# EAGLE board Apo Board 2017  (EAGLE 7.3.0)
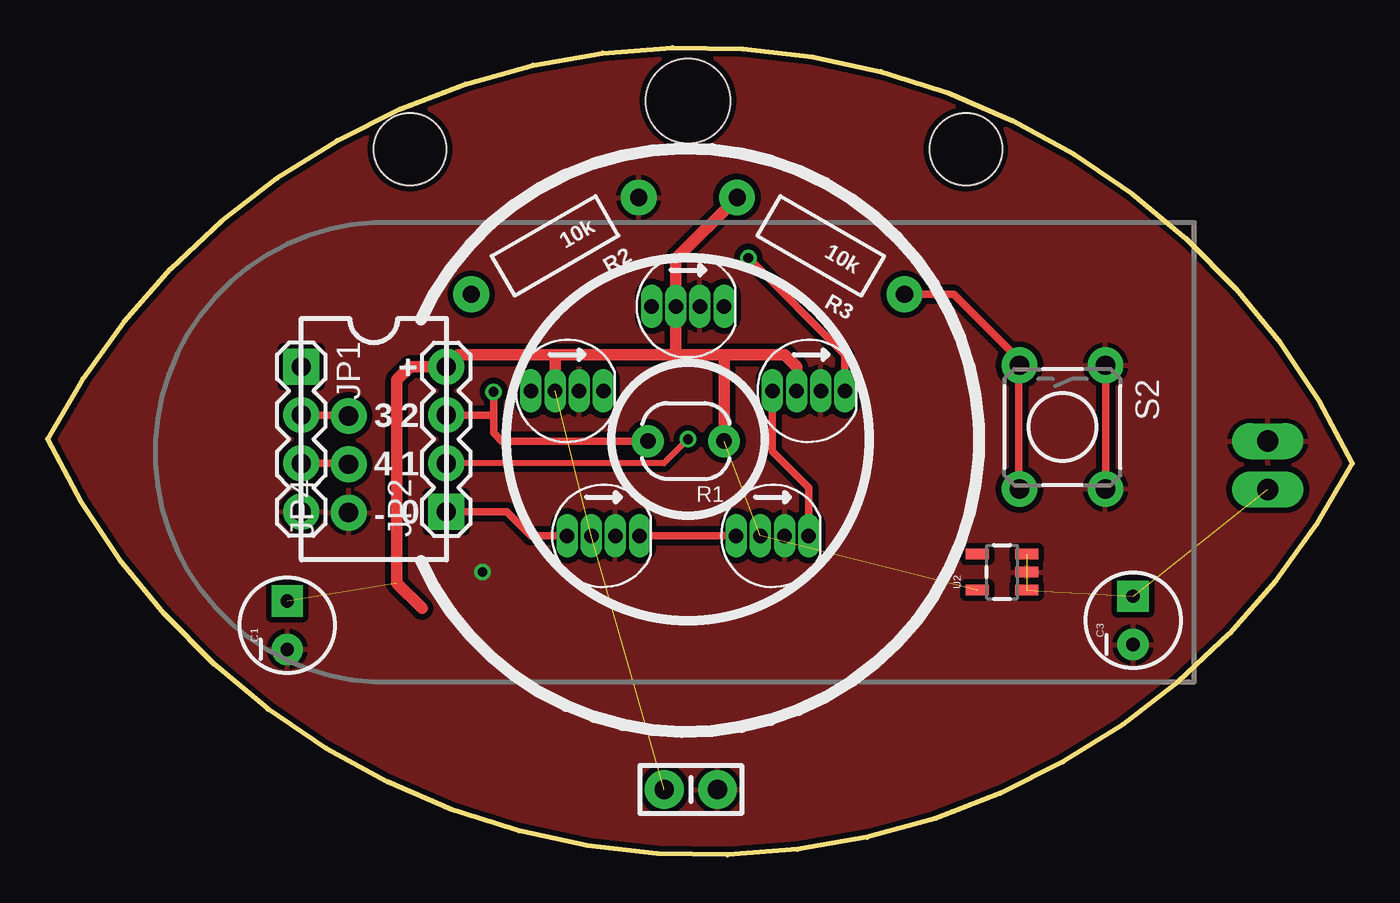
[diagram p0: board, top side]
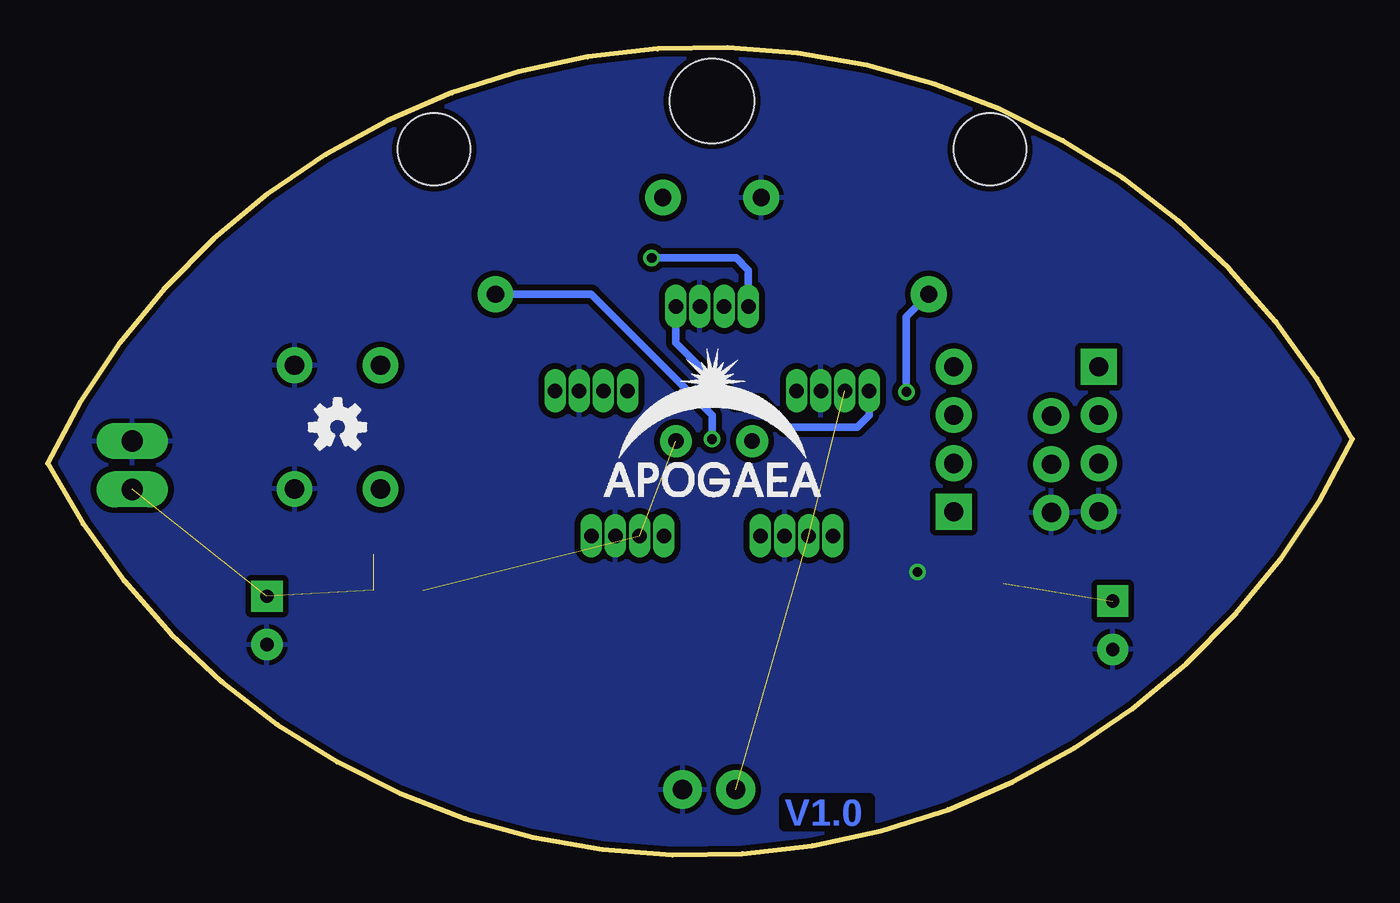
[diagram p1: board, bottom side, seen from below]

Size 68.58 x 42.43 mm. Coordinates in mm from the lower left corner, seen from the top.
Outline: 0,21.85 arc-127 68.58,20.58 arc-127 0,21.85
Copper layers (1*16): Top 0.035mm / dielectric 1.5mm / Bottom 0.035mm
Design rules "SparkFun-2-layer-TIGHT": minimum track width 7mil, minimum drill 15mil, track to track 7mil, track to pad 7mil, pad to pad 7mil, via to via 7mil, smd to smd 7mil, copper to edge 7mil, drill to drill 7mil, minimum pad ring 7mil, minimum via ring 7mil, stop-mask expansion 4mil, vias tented up to drill 25mil, thermal gap 10mil
Net classes: 0 Default: width 0.203 mm
Holes 4.45 mm at 33.66,39.63
Holes 3.81 mm at 19.05,37.09 48.26,37.09

## Footprints (pad centres in the part's own frame; a part is rotated, then mirrored left to right if it is on the bottom)
CAP-PTH-SMALL-KIT = drill 1.016 pad 2.032: 1 -1.397,0; 2 1.397,0
CPOL-RADIAL-10UF-25V = drill 0.7 pad 1.651 square: 1 1.27,0 | drill 0.7 pad 1.651: 2 -1.27,0
1X04 = drill 1.016 pad 1.88 square: 1 0,0 | drill 1.016 pad 1.88: 2 2.54,0; 3 5.08,0; 4 7.62,0
1X02_LONGPADS = drill 1.118 pad 1.88 long: 1 0,0; 2 2.54,0
1X03_NO_SILK = drill 1.016 pad 1.88: 1 0,0; 2 2.54,0; 3 5.08,0
PHOTOCELL = drill 0.8 pad 1.676: 1 -2,0; 2 2,0
AXIAL-0.4 = drill 0.9 pad 1.88: P$1 -5.08,0; P$2 5.08,0
TACTILE-PTH = drill 1.016 pad 1.88: 1 -3.251,2.261; 2 3.251,2.261; 3 -3.251,-2.261; 4 3.251,-2.261
SOT23-5 = smd 0.55 x 1.2: 1 -0.95,-1.3; 2 0,-1.3; 3 0.95,-1.3; 4 0.95,1.3; 5 -0.95,1.3
LED-RGB-THRU = drill 0.762 pad 0.889 long: 1 1.905,0; 2 0.635,0; 3 -0.635,0; 4 -1.905,0

## Placement (x,y rotation side)
0.1UF  [CAP-PTH-SMALL-KIT]  33.81,3.44 0 top
C1  [CPOL-RADIAL-10UF-25V]  12.6,12.07 90 top
C3  [CPOL-RADIAL-10UF-25V]  57.05,12.33 90 top
FRAME1  FRAME-LETTER  [CREATIVE_COMMONS]  16.87,-8.37 0 top  (outside the outline)
JP1  [1X04]  13.33,25.66 270 top
JP2  [1X04]  20.95,18.04 90 top
JP3  M02PTH3  [1X02_LONGPADS]  64.13,21.75 270 top
JP4  [1X03_NO_SILK]  15.82,17.99 90 top
LOGO1  OSHW-LOGOS  [OSHW-LOGO-S]  53.34,22.49 0 bottom
R1  PHOTOCELLPTH  [PHOTOCELL]  33.55,21.75 180 top
R2  10k  [AXIAL-0.4]  26.67,32.01 210 top
R3  10k  [AXIAL-0.4]  40.64,32.01 150 top
S2  [TACTILE-PTH]  53.34,22.49 270 top
U2  [SOT23-5]  50.16,14.87 90 top
U3  LED-TRICOLOR-5050-IC  [LED-RGB-THRU]  33.66,28.84 180 top
U4  LED-TRICOLOR-5050-IC  [LED-RGB-THRU]  27.3,24.39 180 top
U5  LED-TRICOLOR-5050-IC  [LED-RGB-THRU]  40,24.39 180 top
U6  LED-TRICOLOR-5050-IC  [LED-RGB-THRU]  38.1,16.77 180 top
U7  LED-TRICOLOR-5050-IC  [LED-RGB-THRU]  29.21,16.77 180 top

## Library data of the parts
0.1UF C1 C3 = SparkFun-Capacitors
FRAME1 LOGO1 = SparkFun-Aesthetics
JP1-JP4 = SparkFun-Connectors
R1 = SparkFun-Sensors
R2 R3 = SparkFun-Resistors
S2 = SparkFun-Electromechanical
U2 = SparkFun-PowerIC; PROD_ID: VREG-00823
U3-U7 = SparkFun-LED

## Nets
2: JP1.2 JP4.3
3: JP1.3 JP4.2
GND: 0.1UF.2 C1.2 C3.2 JP1.4 JP3.1 JP4.1 R2.P$1 S2.1 S2.2 U2.2 U3.3 U4.3 U5.3 U6.3 U7.3
MISO: JP2.2 R3.P$1 S2.3 S2.4
MOSI: JP2.1 U7.1
N$1: U6.1 U7.4
N$2: U5.1 U6.4
N$5: U3.1 U5.4
N$6: U3.4 U4.1
RST: JP1.1
SCK: JP2.3 R1.2 R2.P$2
VCC: 0.1UF.1 C1.1 JP2.4 R1.1 R3.P$2 U2.5 U3.2 U4.2 U5.2 U6.2 U7.2
VREG: C3.1 JP3.2 U2.1 U2.3

## Tracks (layer width: path | path; a pad name or v marks a point on that pad's centre or on a via)
2
  Top 0.406: JP4.3 15.77,23.12 JP1.2
3
  Top 0.406: JP4.2 15.77,20.58 JP1.3
GND  (via drill 0.51)
  other vias: 22.86,14.87
  pour Top (isolate 0.305): -5.08,45.98 71.12,45.35 70.48,-2.91 -5.72,-2.28
  pour Bottom (isolate 0.305): -5.08,47.89 74.3,47.25 73.66,-3.55 -5.72,-2.91
MISO  (via drill 0.51)
  Top 0.254: S2.4 S2.3 51.08,26.02
  Top 0.305: v33.66,21.85 32.39,20.58 JP2.2
  Top 0.406: 51.08,26.02 47.63,29.47 R3.P$1
  Bottom 0.406: v33.66,21.85 33.66,23.12 40.01,29.47 R3.P$1
MOSI
  Top 0.406: JP2.1 24.13,18.04 25.4,16.77 U7.1
N$1
  Top 0.406: U7.4 U6.1
N$2
  Top 0.406: U6.4 40.01,19.31 38.1,21.22 U5.1
N$5  (via drill 0.51)
  Top 0.406: U5.4 41.91,26.3 v36.83,31.38
  Bottom 0.406: v36.83,31.38 32.39,31.38 31.75,30.74 U3.1
N$6
  Bottom 0.406: U3.4 35.56,26.93 32.39,23.76 31.12,23.76 29.85,22.49 26.04,22.49 25.4,23.12 U4.1
SCK  (via drill 0.51)
  Top 0.305: 23.39,23.12 23.44,23.07
  Top 0.406: R1.2 23.88,21.75 23.44,22.18 23.44,23.07 v23.44,24.34 | JP2.3 23.39,23.12
  Bottom 0.406: v23.44,24.34 23.44,28.3 R2.P$2
VCC  (5 unrouted)
  Top 0.61: R3.P$2 33.02,31.33 U3.2 33.02,26.3 | U5.2 39.37,25.66 38.74,26.3 35.55,26.3 | U4.2 26.67,26.3 | 26.67,26.3 21.59,26.3 JP2.4 19.05,25.66 18.36,24.98 18.36,14.28 19.69,12.96 | 26.67,26.3 33.02,26.3 | 33.02,26.3 35.55,26.3 | R1.1 35.55,26.3
VREG  (3 unrouted)

## Text on the board
Bottom: V1.0
tPlace: + | 3 | 2 | 4 | 1 | 0 | -
tDocu: + | 3 | 2 | 4 | 1 | - | 0